# Allegro board msd_foot_ext3.brd
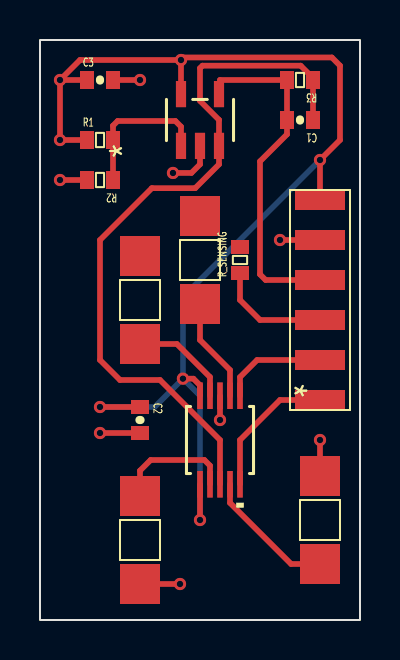
[diagram p0: board, top side]
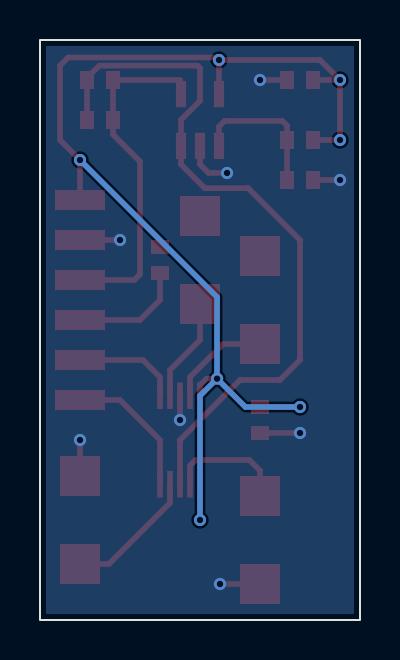
[diagram p1: board, bottom side, seen from below]

Outline 16 x 29 mm; copper layers: TOP, BOTTOM. Coordinates in mm from the lower left corner of the outline.
Outline path: rectangle 0,0 16,29

## Design rules (mm)
constraint set DEFAULT: min track width 0.281

## Placement (name value [footprint] x y rotation side)
C1  47pF  [0402-CAP]  13 25 180 top
C2  0.1uF  [0402-CAP]  5 10 270 top
C3  0.1uF  [0402-CAP]  3 27 0 top
IO3  -  [EXT2_EXT3_CONNECTOR]  14 16 0 top
NOREF  -  []  16 0 90 top
NOREF#2  -  []  0 29 0 top
R1  10k  [0402-RES]  3 24 0 top
R2  1k  [0402-RES]  3 22 180 top
R3  6.8k  [0402-RES]  13 27 180 top
R_SENSING  5k  [0402-RES]  10 18 90 top
SC1  Strain Cell  [STRAIN_CELL]  8 18 270 top
SC2  Strain Cell  [STRAIN_CELL]  14 5 270 top
SC3  Strain Cell  [STRAIN_CELL]  5 16 270 top
SC4  Strain Cell  [STRAIN_CELL]  5 4 90 top
U1  TMUX1104DGSR  [DGS10_TEX]  9 9 270 top
U2  MCP6001UT-EOT  [SOT-23-5_MC_MCH]  8 25 90 top

## Library data of the parts
C1-C3 = CAP NP
IO3 = EXT2_EXT3_CONNECTOR
R1-R3 R_SENSING = R
SC1-SC4 = Strain Cell
U1 = TMUX1104DGSR: User Part Number: PN; Tolerance: TOL
U2 = MCP6001UT-EOT: User Part Number: PN; Tolerance: TOL

## Footprints (pads in the part's own frame, mm; a bottom-side part is the same pattern mirrored in y, then rotated)
0402-CAP
  rect 0.7x0.9 smd: 1(-0.65,0) 2(0.65,0)
0402-RES
  rect 0.7x0.9 smd: 1(-0.65,0) 2(0.65,0)
DGS10_TEX
  rect 1.328x0.279 smd: 1(-2.213,1) 2(-2.213,0.5) 3(-2.213,0) 4(-2.213,-0.5) 5(-2.213,-1) 6(2.213,-1) 7(2.213,-0.5) 8(2.213,0) 9(2.213,0.5) 10(2.213,1)
EXT2_EXT3_CONNECTOR
  rect 2.5x1 smd: 1(0,5) 2(0,3) 3(0,1) 4(0,-1) 5(0,-3) 6(0,-5)
SOT-23-5_MC_MCH
  rect 1.31x0.508 smd: 1(-1.295,0.95) 2(-1.295,0) 3(-1.295,-0.95) 4(1.295,-0.95) 5(1.295,0.95)
STRAIN_CELL
  rect 2x2 smd: 1(-2.2,0) 2(2.2,0)

## Nets
GND: C2.2 C3.2 IO3.2 R2.2 R_SENSING.2 SC1.1 SC2.1 SC3.1 SC4.1 U1.3 U2.2(VSS)
VDD: C2.1 C3.1 IO3.1(VDD) R1.1 U1.5 U1.6(VDD) U2.5
CNC: IO3.4 R_SENSING.1
SEL0: IO3.5 U1.1
SEL1: IO3.6 U1.10
VOUT: C1.2 IO3.3 R3.2 U2.4
N33079: C1.1 R3.1 U1.8 U2.3
N33209: R1.2 R2.1 U2.1
N33239: SC4.2 U1.7
N33247: SC3.2 U1.4
N33305: SC2.2 U1.9
N33313: SC1.2 U1.2

## Via types
v1: diameter 0.61, hole 0.33, TOP to BOTTOM, 15 vias

## Routing (per net, layer and track width the routed paths; a pad name or vN(x,y) marks a point on that pad's centre or on a via; arc(x,y) is an arc through that point)
GND: length 14.2
  TOP w0.281: SC2.1 v1(14,9) ; SC4.1 v1(7,1.8) ; C3.2 v1(5,27) ; U2.2 8,22.78 7.57,22.35 v1(6.65,22.35) ; R2.2 v1(1,22) ; IO3.2 v1(12,19) ; U1.3 v1(9,10) ; C2.2 v1(3,9.35)
VDD: length 60.4
  TOP w0.281: C3.1 v1(1,27) ; v1(1,27) v1(1,24) R1.1 ; v1(1,27) 2,28 v1(7.05,28) ; U2.5 v1(7.05,28) ; v1(7.05,28) 7.18,28.13 14.59,28.13 15,27.72 15,24 v1(14,23) IO3.1 ; U1.6 v1(8,5) ; v1(7.15,12.07) 7.67,12.07 8,11.74 U1.5 ; C2.1 v1(3,10.65)
  BOTTOM w0.281: v1(7.15,12.07) 5.73,10.65 v1(3,10.65) ; v1(7.15,12.07) 7.15,16.15 v1(14,23) ; v1(7.15,12.07) U1.5 v1(8,5)
CNC: length 5.8
  TOP w0.281: R_SENSING.1 10,16 11,15 IO3.4
SEL0: length 5.3
  TOP w0.281: U1.1 10,12.14 10.86,13 IO3.5
SEL1: length 7
  TOP w0.281: U1.10 10,9 12,11 IO3.6
VOUT: length 17.5
  TOP w0.281: U2.4 9,26.3 9,27 R3.2 C1.2 12.35,24.28 11,22.93 11,17.28 11.28,17 IO3.3
N33079: length 36.6
  TOP w0.281: U1.8 9,9 6,12 4,12 3,13 3,19 5.59,21.59 7.76,21.59 8.95,22.78 U2.3 8.95,25.01 8,25.96 8,27.59 8.13,27.72 13.03,27.72 13.65,27.1 R3.1 C1.1
N33209: length 7.3
  TOP w0.281: R2.1 R1.2 3.65,24.72 3.88,24.95 6.77,24.95 7.05,24.67 U2.1
N33239: length 6
  TOP w0.281: U1.7 8.5,7.72 8.22,8 5.53,8 5,7.47 SC4.2
N33247: length 5.1
  TOP w0.281: U1.4 8.5,12.14 6.85,13.8 SC3.2
N33305: length 6.7
  TOP w0.281: U1.9 9.5,5.85 12.56,2.8 SC2.2
N33313: length 5.2
  TOP w0.281: SC1.2 8,14 9.5,12.5 U1.2

## Copper pours and planes (outline as drawn; the poured copper is in the pictures)
GND on BOTTOM: 0.3,28.7 15.7,28.7 15.7,0.3 0.3,0.3
